# Altium PCB SCOM_BATTPACK.PcbDoc
Units mm, origin at the board's own origin, x right, y up, seen from the top; angles counter-clockwise.
Board outline 137.1 x 87.1 mm, 2 copper layers (L1, L2), stack 1.58 mm thick; 67 components, 36 nets, 209 pads, 776 vias.
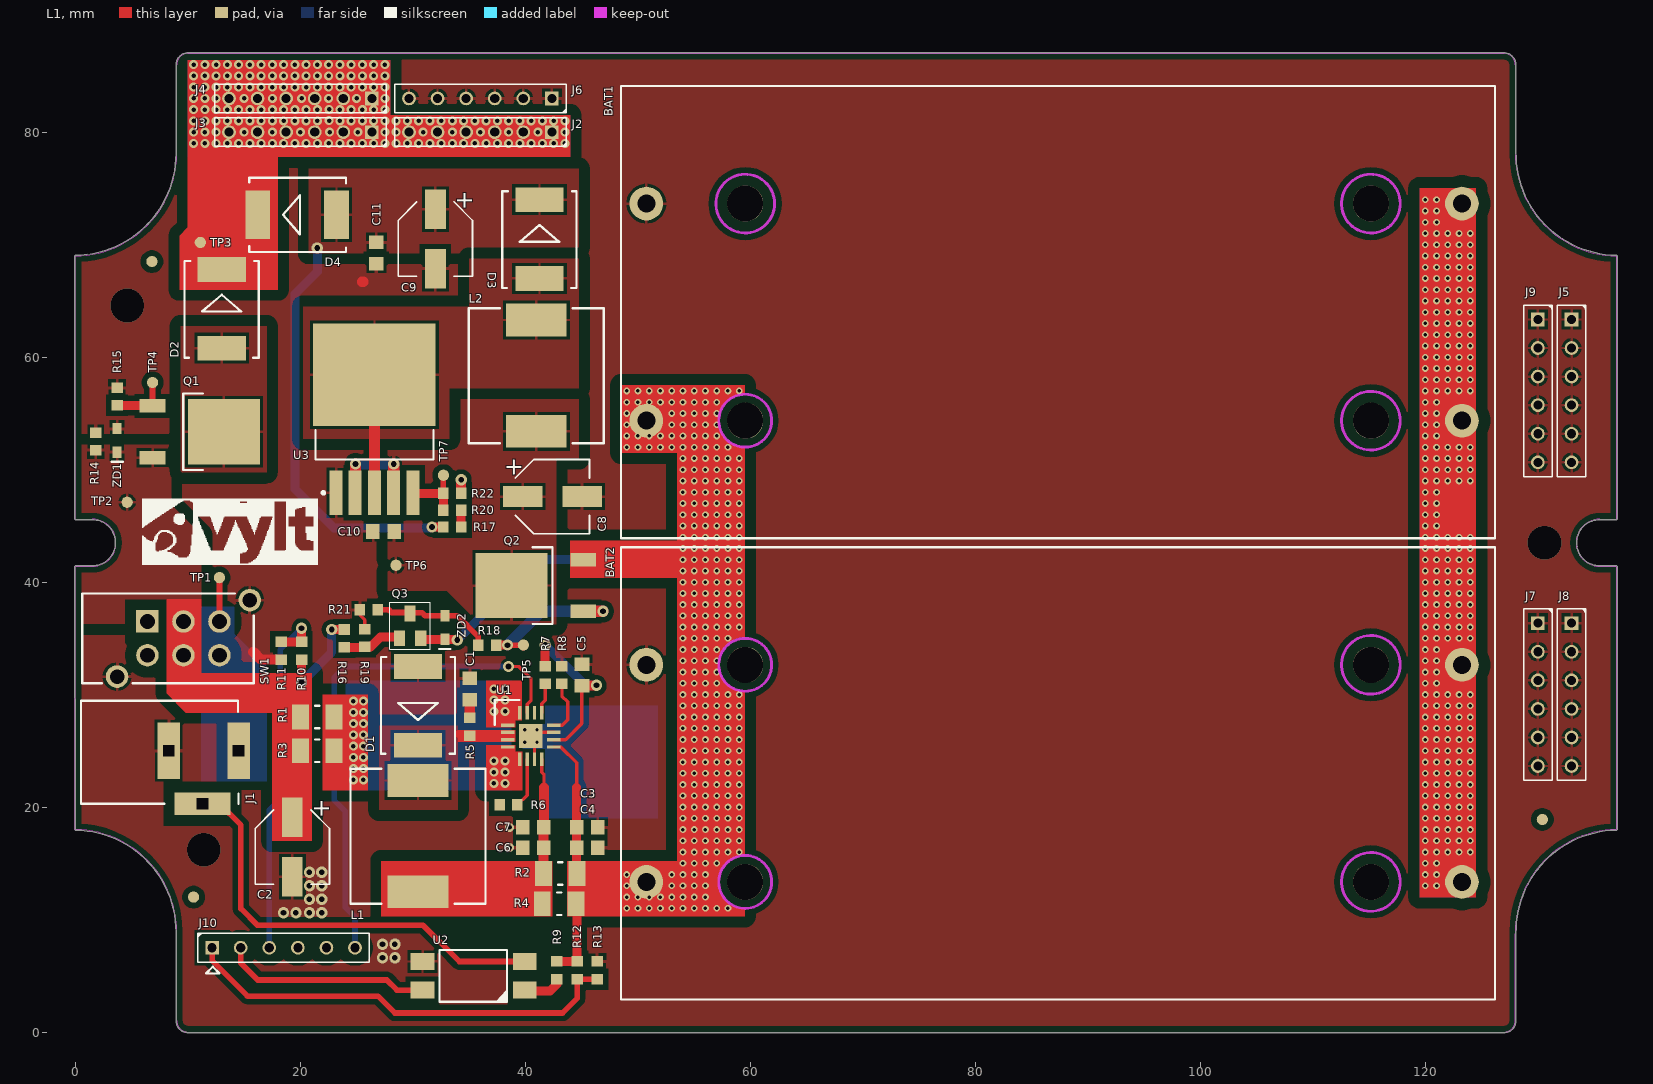
[diagram p0: L1 view]
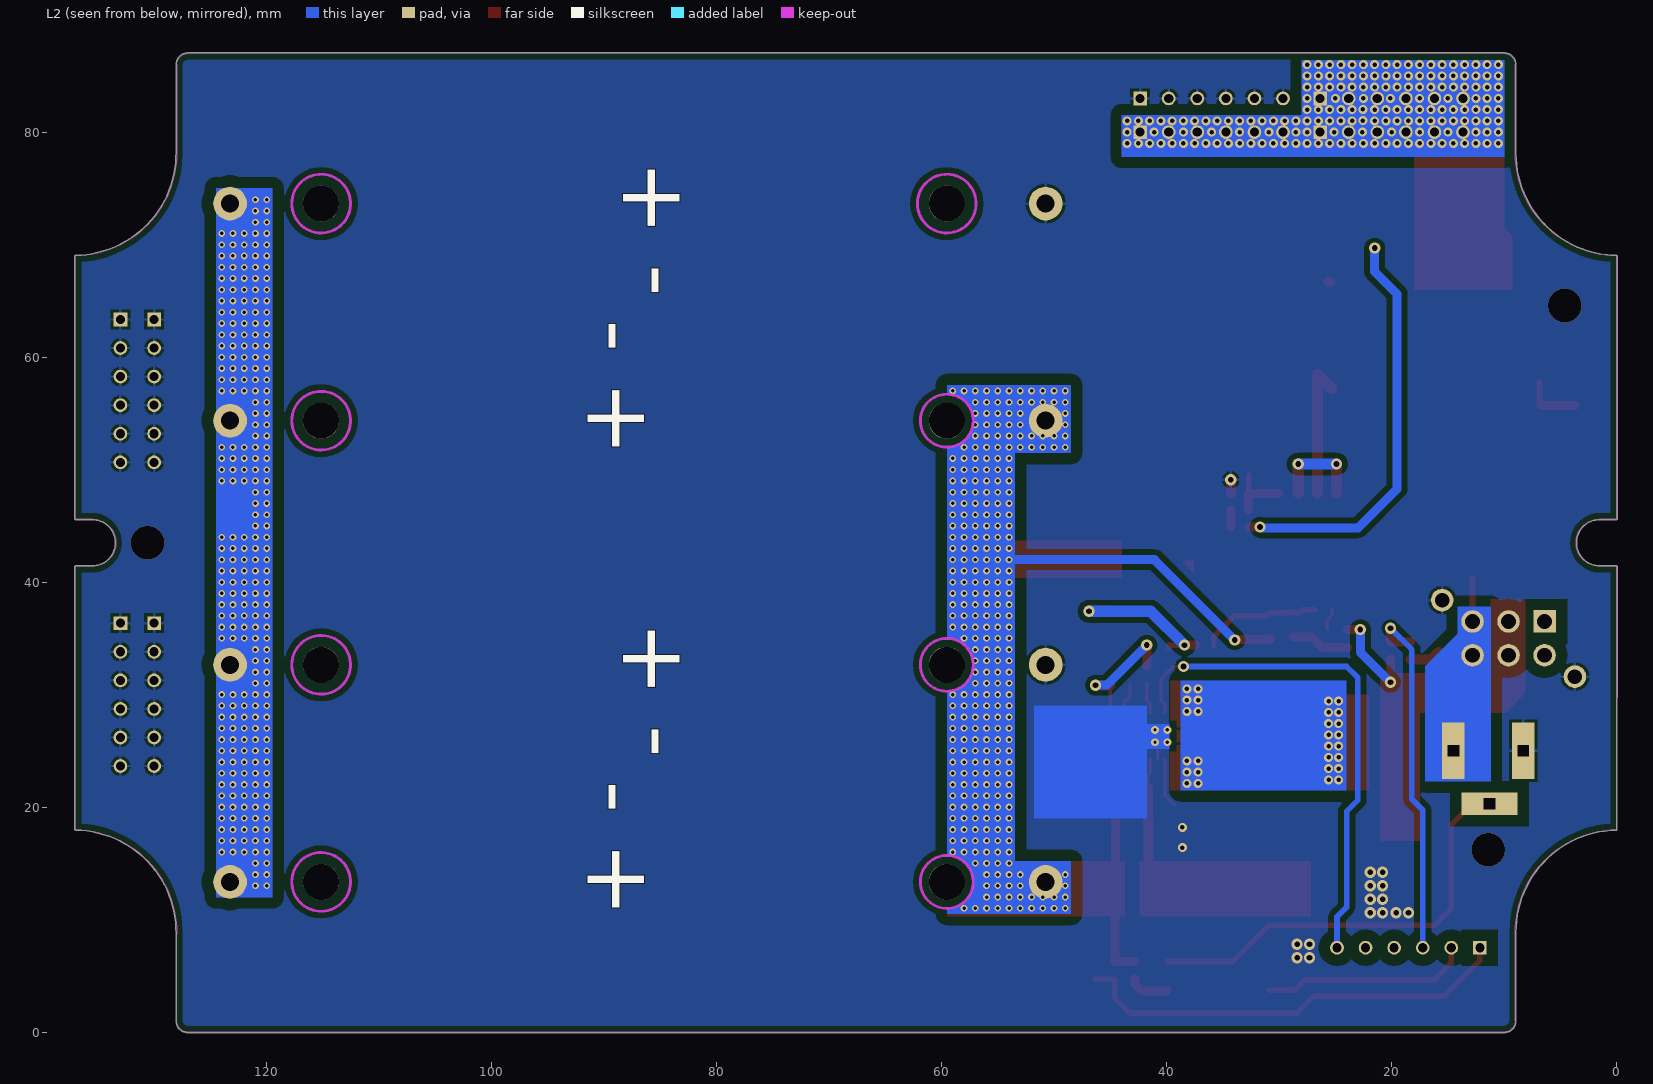
[diagram p1: L2 view, seen from below]
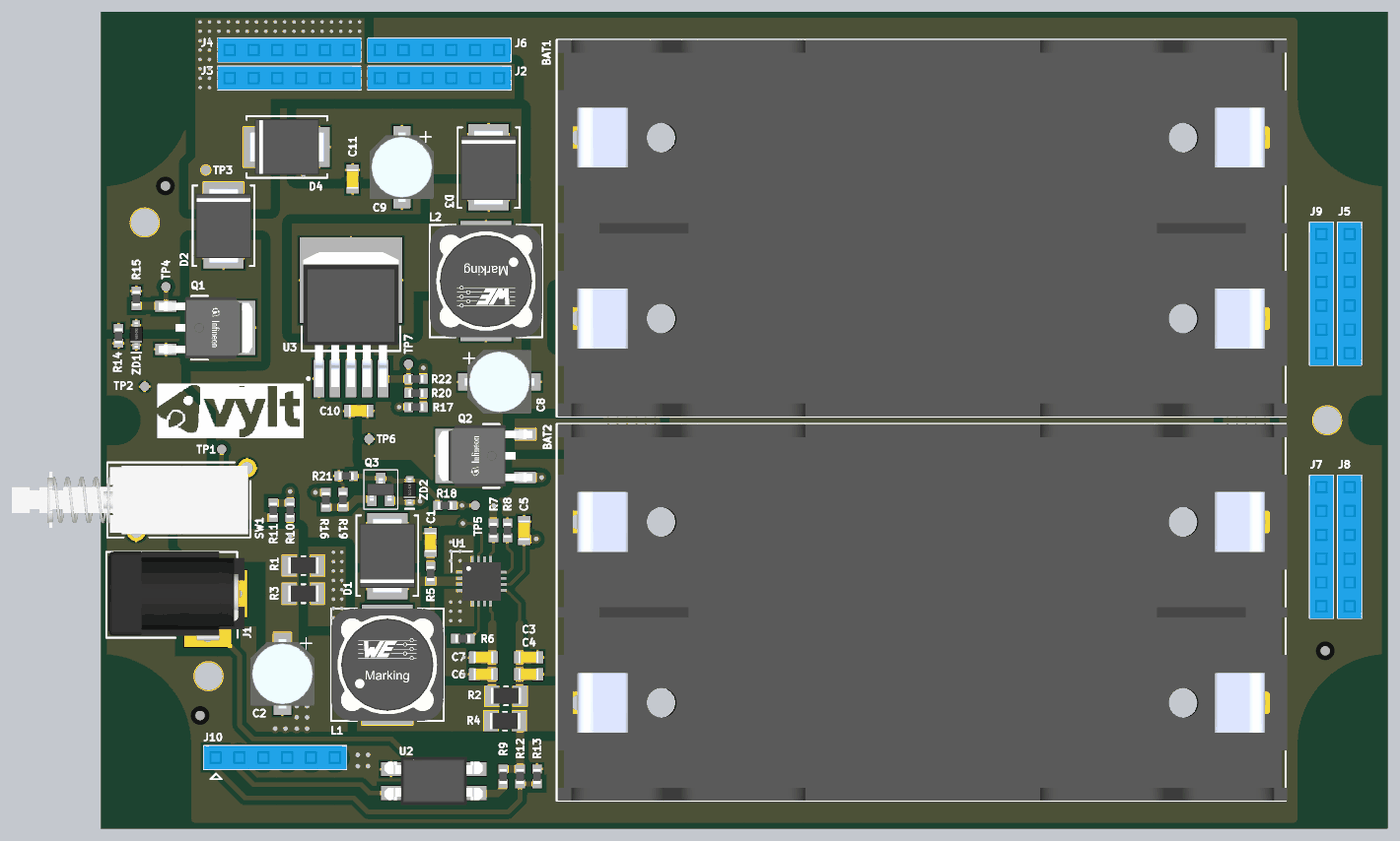
[diagram p2: 3D render of the assembled board from above, using the file's embedded part models]

## Layer stack, top to bottom
Top Solder: solder mask 0.01, Solder Resist, Dk 3.5
L1: signal copper 0.035
Dielectric 1: core 1.51, FR-4, Dk 4
L2: signal copper 0.035
Bottom Solder: solder mask 0.01, Solder Resist, Dk 3.5

## Board outline
-0.004,17.95 -0.05,41.4 0,41.45 1.5,41.45 ccw(c1.5,43.5) 3.55,43.5 ccw(c1.5,43.5) 1.5,45.55 0,45.55 -0.053,45.603 -0.053,69 -0.004,69.05 ccw(c-0.126,78.123) 8.947,78.124 8.947,78.247 8.947,85.997 8.95,86.014 cw(c10,86) 10,87.05 127,87.05 cw(c127,86) 128.05,86.014 128.053,85.997 128.054,78.247 ccw(c137.126,78.123) 137.003,69.051 137.05,68.983 137.05,45.6 137,45.55 135.5,45.55 ccw(c135.5,43.5) 135.5,41.45 137,41.45 137.05,41.4 137.05,18.017 137.004,17.95 ccw(c137.126,8.877) 128.053,8.754 128.053,1.003 128.05,0.986 cw(c127,1) 127,-0.05 10,-0.05 cw(c10,1) 8.95,0.986 8.947,1.003 8.947,8.753 8.947,8.877 ccw(c-0.126,8.877)

## Design rules (kind name [scope] priority, off if disabled: settings)
Clearance [All] p1: gap=0.254 ignorepadtopadclearanceinfootprint=FALSE except(0.178: Track-Track Track-SMDPad SMDPad-SMDPad; 0.5: Arc-Poly Track-Poly SMDPad-Poly; 1: THPad-Poly Poly-Poly Poly-Region)
Height [All] p1: minheight=0 maxheight=55 prefheight=12.7
HoleSize [All] p1: absolutevalues=TRUE maxlimit=10 minlimit=0.025 maxpercent=80.000 minpercent=20.000
MinimumSolderMaskSliver [All] p1: minsoldermaskwidth=0.203
PolygonConnect [All] p1: connectstyle=Relief reliefconductorwidth=0.254 reliefentries=4 polygonreliefangle="90 Angle" airgapwidth=0.254
RoutingVias [All] p1: holewidth=0.711 width=1.27 viastyle="Through Hole" minholewidth=0.1 minwidth=0.1 maxholewidth=0.711 maxwidth=1.27
SilkToSolderMaskClearance [IsPad] p1: minsilkscreentomaskgap=0.203 clearancetoexposedcopper=TRUE
SolderMaskExpansion [All] p1: expansion=0.102 istentingtop=FALSE
SupplyNets "Schematic Supply Nets_5" [InNet('12V0')] p1: voltage=0.000
SupplyNets "Schematic Supply Nets_7" [InNet('TP5100_BATT')] p2: voltage=0.000
SupplyNets "Schematic Supply Nets_6" [InNet('TP5100_VREG')] p3: voltage=0.000
SupplyNets "Schematic Supply Nets_4" [InNet('TP5100_VS')] p4: voltage=0.000
SupplyNets "Schematic Supply Nets_2" [InNet('VCC')] p5: voltage=0.000
SupplyNets "Schematic Supply Nets" [InNet('VIN')] p6: voltage=0.000
SupplyNets "Schematic Supply Nets_1" [InNet('GND')] p7: voltage=0.000
Width [All] p1: maxlimit=5 minlimit=0.178 preferedwidth=0.5
26 further rules are at their usual default settings.

## Classes and differential pairs
net class TP7_Nets: NetR20_2
net class TP6_Nets: NetC8_1
net class R22_Nets: GND NetR20_2
net class R20_Nets: NetR17_2 NetR20_2
net class R17_Nets: NetC9_1 NetR17_2
net class R14_Nets: GND VIN
net class R9_Nets: NetR9_2 TP5100_BATT
net class J2_Nets: 12V0
net class C10_Nets: GND NetC8_1
net class C4_Nets: GND TP5100_BATT
net class R13_Nets: BATT_SOC GND
net class R12_Nets: BATT_SOC TP5100_BATT
net class C9_Nets: GND NetC9_1
net class TP5_Nets: NetQ2_1
net class TP4_Nets: NetQ1_1
net class TP2_Nets: VIN
net class TP1_Nets: VCC
net class TP3_Nets: 12V0
net class R11_Nets: ADAP_VOLT GND
net class R10_Nets: ADAP_VOLT VIN
net class U3_Nets: GND NetC8_1 NetD3_2 NetR20_2
net class R21_Nets: GND NetQ3_3
net class L2_Nets: NetC8_1 NetD3_2
net class D4_Nets: 12V0 NetC9_1
net class C11_Nets: GND NetC9_1
net class C8_Nets: GND NetC8_1
net class C7_Nets: GND TP5100_VS
net class ZD2_Nets: NetQ3_3 TP5100_BATT
net class ZD1_Nets: GND VIN
net class R19_Nets: GND NetQ3_1
net class R18_Nets: NetQ2_1 NetQ3_3
net class R16_Nets: NetQ3_1 VIN
net class R15_Nets: GND NetQ1_1
net class Q3_Nets: NetQ3_1 NetQ3_3 TP5100_BATT
net class Q2_Nets: NetC8_1 NetQ2_1 TP5100_BATT
net class Q1_Nets: NetD2_2 NetQ1_1 VIN
net class D3_Nets: NetC9_1 NetD3_2
net class D2_Nets: 12V0 NetD2_2
net class R6_Nets: NetR6_1 NetR6_2
net class C1_Nets: GND NetC1_1
net class J10_Nets: ADAP_DET_LV ADAP_VOLT BATT_CHRG BATT_SOC NetJ10_4 NetJ10_5
net class C6_Nets: GND TP5100_VS
net class J8_Nets: GND
net class J3_Nets: 12V0
net class D1_Nets: GND NetD1_1
net class C5_Nets: GND TP5100_VREG
net class J6_Nets: GND
net class J7_Nets: GND
net class J4_Nets: 12V0
net class J5_Nets: GND
net class J9_Nets: GND
net class U2_Nets: ADAP_DET_HV ADAP_DET_LV GND NetR9_2
net class R5_Nets: NetC1_1 NetD1_1
net class R2_Nets: TP5100_BATT TP5100_VS
net class SW1_Nets: GND NetSW1_1 NetSW1_4 VCC VIN
net class C2_Nets: GND VIN
net class J1_Nets: ADAP_DET_HV GND VCC
net class U1_Nets: BATT_CHRG GND NetD1_1 NetR1_1 NetR6_2 NetR7_2 NetR8_2 NetU1_14 TP5100_BATT TP5100_VREG TP5100_VS
net class R8_Nets: GND NetR8_2
net class R7_Nets: NetR7_2 TP5100_VREG
net class R4_Nets: TP5100_BATT TP5100_VS
net class R3_Nets: NetR1_1 VIN
net class R1_Nets: NetR1_1 VIN
net class L1_Nets: NetD1_1 TP5100_VS
net class C3_Nets: GND TP5100_BATT
net class BAT2_Nets: GND NetBAT1_2 TP5100_BATT
net class BAT1_Nets: GND NetBAT1_2 TP5100_BATT

## Components (designator, comment, footprint, x,y, rotation, side; value= is the part's Value field where it differs from the comment)
BAT1 "BK-18650-PC4" BK-18650-PC4 87,64 r0 top locked
BAT2 "BK-18650-PC4" BK-18650-PC4 87,23 r0 top locked
C1 "MLCC_0805" CAPC2012X13L 35.055,30.489 r90 top value=100pF
C2 "ERP_102-2" CAP_6.3_7.7 19.277,16.45 r270 top locked value=220uF
C3 "MLCC_0805" CAPC2012X13L 45.5,18.2 r0 top value=10uF
C4 "MLCC_0805" CAPC2012X13L 45.5,16.4 r0 top value=100nF
C5 "MLCC_0805" CAPC2012X13L 45.031,31.75 r90 top value=100nF
C6 "MLCC_0805" CAPC2012X13L 40.7,16.4 r180 top value=10uF
C7 "MLCC_0805" CAPC2012X13L 40.7,18.2 r180 top value=100nF
C8 "ERP_102-2" CAP_6.3_7.7 42.4,47.6 r0 top value=220uF
C9 "ERP_102-2" CAP_6.3_7.7 32,70.5 r270 top value=220uF
C10 "MLCC_0805" CAPC2012X13L 27.4,44.5 r180 top value=100nF
C11 "MLCC_0805" CAPC2012X13L 26.75,69.25 r270 top value=100nF
D1 "ERP_104-3" DIOM6959X26L 30.451,29 r90 top value=SS54C
D2 "ERP_104-3" DIOM6959X26L 13,64.3 r270 top value=SS54C
D3 "ERP_104-3" DIOM6959X26L 41.25,70.5 r270 top value=SS54C
D4 "ERP_104-3" DIOM6959X26L 19.7,72.656 r0 top value=SS54C
J1 "KLDX-0202-AC" KLDX-0202-AC 14.5,25 r0 top locked value=NA
J2 "ERP_148-2" 6PX1R_F 36,80 r0 top locked
J3 "ERP_148-2" 6PX1R_F 20,80 r0 top locked
J4 "ERP_148-2" 6PX1R_F 20,83 r0 top locked
J5 "ERP_148-2" 6PX1R_F 133,57 r90 top locked
J6 "ERP_148-2" 6PX1R_F 36,83 r0 top locked
J7 "ERP_148-2" 6PX1R_F 130,30 r90 top locked
J8 "ERP_148-2" 6PX1R_F 133,30 r90 top locked
J9 "ERP_148-2" 6PX1R_F 130,57 r90 top locked
J10 "ERP_148-2" 6PX1R_F 18.5,7.5 r180 top locked
L1 "IND_1212" IND_1212 30.451,17.417 r270 top locked value=22uH
L2 "IND_1212" IND_1212 40.966,58.35 r90 top value=47uH
Q1 "IRFR5305TRPBF" DPAK229P991X239-3M 11.079,53.361 r270 top
Q2 "IRFR5305TRPBF" DPAK229P991X239-3M 40.9,39.7 r90 top
Q3 "ERP_105-1" MMBT2222 29.748,36.111 r0 top value=MMBT2222A
R1 "RES_1206" RESC3116X06M 21.5,28 r180 top locked value=0R4
R2 "RES_1206" RESC3116X06M 43.1,14.1 r180 top value=0R2
R3 "RES_1206" RESC3116X06M 21.5,25 r180 top locked value=0R4
R4 "RES_1206" RESC3116X06M 43,11.4 r180 top value=0R2
R5 "ERP_101-1" RES_0603 35.055,27.14 r270 top value=3R
R6 "ERP_101-1" RES_0603 38.5,20.2 r0 top value=0R
R7 "ERP_101-1" RES_0603 41.75,31.75 r270 top value=0R
R8 "ERP_101-1" RES_0603 43.25,31.75 r270 top value=50k
R9 "ERP_101-1" RES_0603 42.8,5.5 r270 top value=220R
R10 "ERP_101-1" RES_0603 20.1,33.9 r270 top value=330k
R11 "ERP_101-1" RES_0603 18.3,33.9 r270 top value=100k
R12 "ERP_101-1" RES_0603 44.6,5.5 r90 top value=220k
R13 "ERP_101-1" RES_0603 46.4,5.5 r270 top value=100k
R14 "ERP_101-1" RES_0603 1.8,52.5 r270 top value=100k
R15 "ERP_101-1" RES_0603 3.7,56.5 r270 top value=0R
R16 "ERP_101-1" RES_0603 23.897,35 r90 top value=1k
R17 "ERP_101-1" RES_0603 33.5,44.9 r0 top value=470R
R18 "ERP_101-1" RES_0603 36.6,34.4 r0 top value=0R
R19 "ERP_101-1" RES_0603 25.719,35.031 r90 top value=NM
R20 "ERP_101-1" RES_0603 33.5,46.4 r180 top value=8k2
R21 "ERP_101-1" RES_0603 26.066,37.548 r180 top value=1k
R22 "ERP_101-1" RES_0603 33.5,47.9 r0 top value=1k
SW1 "ERP_110-4" PBH2U 9.6,35 r270 top locked
TP1 "TP_1MM" TP_1MM#1 12.8,40.4 r180 top
TP2 "TP_1MM" TP_1MM#1 4.6,47.1 r180 top
TP3 "TP_1MM" TP_1MM#1 11.1,70.2 r180 top
TP4 "TP_1MM" TP_1MM#2 6.853,57.636 r180 top
TP5 "TP_1MM" TP_1MM#1 39.815,34.41 r180 top
TP6 "TP_1MM" TP_1MM#1 28.5,41.5 r180 top
TP7 "TP_1MM" TP_1MM#3 33,50 r180 top
U1 "TP5100" QFN65P400X400X90_HS-17M 40.48,26.317 r0 top locked
U2 "FOD817A3SD" FOD817A3SD 35.4,5 r180 top
U3 "XL6019" DPAK171P1524X483-6M 26.579,53.192 r90 top
ZD1 "MM3Z" SOD323 3.7,52.6 r90 top value=15V
ZD2 "MM3Z" SOD323 32.832,35.961 r90 top value=15V

## Footprints (in the part's own frame and the unit in brackets; to place one, negate y for a bottom-side part, rotate by r counter-clockwise, add the part's x,y. Pads: shape width x height; smd on the part's side, far side on the other; paste and mask are expansions set on the pad)
6PX1R_F [mm]
  rect 1.22x1.22 / inner round 1.22 / far side rect 1.22x1.22 hole 0.81: 1(6.35,0)
  round 1.22 hole 0.81: 2(3.81,0) 3(1.27,0) 4(-1.27,0) 5(-3.81,0) 6(-6.35,0)
  silkscreen extent -7.62,-1.27 7.62,1.27, body extent -7.62,-1.27 7.62,1.27, height 8.51
BK-18650-PC4 [mm] "2X 18650 Through Hole Battery Holder"
  round 3 hole 1.6: 1(-36.25,9.65) 2(36.25,9.65) 3(-36.25,-9.65) 4(36.25,-9.65)
  round 3.2 hole 3.2 unplated: ""(-27.46,-9.65) ""(-27.46,9.65) ""(28.16,-9.65) ""(28.16,9.65)
  silkscreen extent -38.5,-20.1 39.2,20.1, body extent -38.35,-20.11 39.35,20.11, height 21.74
CAP_6.3_7.7 [mm]
  rect 3.5x1.85 smd: 1(-2.65,0) 2(2.65,0)
  silkscreen extent -3.3,-3.3 3.3,3.3, body extent -3.7,-3.4 3.7,3.4, height 8
CAPC2012X13L [mm] "Chip Capacitor, 2-Leads, Body 2.00x1.25mm, IPC High Density"
  rect 1.2x1.3 smd: 1(-0.95,0) 2(0.95,0)
  body extent -1.05,-0.63 1.05,0.63, height 1.26
DIOM6959X26L [mm] "Molded Diode, 2-Leads, Body 6.86x5.91mm, IPC High Density"
  rect 2.2x4.3 smd: 1(-3.5,0) 2(3.5,0)
  silkscreen extent -4.25,-3.3 4.35,3.3, body extent -3.92,-2.96 4.02,2.96, height 2.62
DPAK171P1524X483-6M [mm] "D2-PAK, 6-Pads, Body 7.93x8.63mm (max), IPC Low Density"
  rect 3.95x1.15 smd: 1(-5.25,3.42) 2(-5.25,1.71) 3(-5.25,0) 4(-5.25,-1.71) 5(-5.25,-3.42)
  rect 9.1x10.9 smd: 6(5.25,0)
  silkscreen extent -5.37,-5.25 0.3,5.25, body extent -6.13,-5.08 8.22,5.08, height 4.65
DPAK229P991X239-3M [mm] "D-PAK, 3-Pads, Body 6.47x6.54mm (max), IPC Low Density"
  rect 1.2x2.28 smd: 1(-2.3,-4.23) 3(2.3,-4.23)
  rect 5.8x6.4 smd: 2(0,2.12)
  silkscreen extent -3.41,-1.5 3.4,0.26, body extent -3.28,-5 3.28,5, height 2.53
FOD817A3SD [mm]
  rect 2.1x1.5 smd: 1(-4.55,1.27) 2(-4.55,-1.27) 3(4.55,-1.27) 4(4.55,1.27)
  silkscreen extent -3,-2.3 3.03,2.3, body extent -5.23,-2.57 5.23,2.53, height 3.84
IND_1212 [mm]
  rect 2.9x5.4 smd: 1(-4.95,0) 2(4.95,0)
  silkscreen extent -6,-6 6,6, body extent -6,-6 6,6, height 8
KLDX-0202-AC [mm] "CONN PWR JACK 2X5.5MM KINKED PIN"
  rect 2x5 hole 1 square: 1(0,0) 2(-6.2,0)
  rect 5x2 hole 1 square: 3(-3.2,-4.7)
  silkscreen extent -14,-4.7 0,4.45, body extent -13.75,-5 0.75,4.5, height 10.85
MMBT2222 [mm]
  rect 1x1.4 smd: 1(-0.95,-1.1) 2(0.95,-1.1) 3(0,1.1)
  silkscreen extent -1.8,-2.1 1.8,2.1, body extent -1.45,-1.2 1.45,1.2, height 1.11
PBH2U [mm]
  rect 2x2 hole 1.3: 1(-1.5,-3.2)
  round 2 hole 1.3: 2(-1.5,0) 3(-1.5,3.2) 4(1.5,-3.2) 5(1.5,0) 6(1.5,3.2) 7(3.4,-5.9) 8(-3.4,5.9)
  silkscreen extent -4,-9 4,6.25, body extent -3.65,-19.2 3.65,6, height 9.15
QFN65P400X400X90_HS-17M [mm] "QFN, 16-Leads, Body 4.00x4.00mm, Pitch 0.65mm, Thermal Pad 2.10x2.10mm, IPC Low Density"
  rect 1.2x0.3 smd mask+0.05: 1(-2.05,0.975) 2(-2.05,0.325) 3(-2.05,-0.325) 4(-2.05,-0.975) 9(2.05,-0.975) 10(2.05,-0.325) 11(2.05,0.325) 12(2.05,0.975)
  rect 0.3x1.2 smd mask+0.05: 5(-0.975,-2.05) 6(-0.325,-2.05) 7(0.325,-2.05) 8(0.975,-2.05) 13(0.975,2.05) 14(0.325,2.05) 15(-0.325,2.05) 16(-0.975,2.05)
  rect 2.1x2.1 smd mask+0.05: 17(0,0)
  silkscreen extent -3.2,1 -1,3.2, body extent -2.05,-2.05 2.05,2.05, height 1
RES_0603 [mm]
  rect 0.94x1.02 smd: 1(-0.79,0) 2(0.79,0)
  body extent -0.8,-0.4 0.8,0.4, height 0.45
RESC3116X06M [mm]
  rect 1.5x2.2 smd: 1(-1.5,0) 2(1.5,0)
  silkscreen extent -0.2,-1 0.2,1, body extent -1.6,-0.85 1.6,0.85, height 0.65
SOD323 [mm] "SOD-323"
  rect 1x0.8 smd: 1(-1.05,0) 2(1.05,0)
  silkscreen extent -1.9,-0.5 -1.9,0.5, body extent -1.35,-0.72 1.35,0.72, height 1.17
TP_1MM#1 [mm]
  round 1 smd: 1(0,0)
TP_1MM#2 [mm]
  round 1 smd: 1(0,-0.11)
TP_1MM#3 [mm]
  round 1 smd: 1(0.29,0.5)

## Part data
BAT1 BAT2: "BATT HOLDER 18650 2 CELL PC PIN", Manufacturer 1=MPD, Manufacturer Part Number 1=BK-18650-PC4
C1 C3 C4 C5 C6 C7 C10 C11: "Chip Capacitor, 2-Leads, Body 2.00x1.25mm, IPC High Density", Package=0805
C2 C8 C9: library part CAP_6.3_7.7, "Electrolytic Capacitor SMD 6.3x7.7", Package=6.3x7.7, ERP=1, Supplier 1=Sharvi
D1 D2 D3 D4: library part SS54, Manufacturer 1=MDD, Manufacturer Part Number 1=SS54C, Package=SMC
J1: "CONN PWR JACK 2X5.5MM KINKED PIN", Manufacturer 1=Sharvi, Manufacturer Part Number 1=ST2001CO0701
J2 J3 J4 J5 J6 J7 J8 J9 J10: library part 6PX1R_F, "6PX1R Female Header"
Q1 Q2: "P Channel MOSFET -55V HEXFET 65mOhms 42nC TO-252-3", Manufacturer 1="International Rectifier", Manufacturer Part Number 1=IRFR5305TRPBF
Q3: library part MMBT2222, "MMBT2222A", Package=SOT23
R1 R2 R3 R4: Package=1206
R5 R6 R7 R8 R9 R10 R11 R12 R13 R14 R15 R16 R17 R18 R19 R20 R21 R22: library part RES_0603, "RES_0603", Package=0603
SW1: library part PBH2U, "Pushbutton Switch DPDT Standard Through Hole, Right Angle", Manufacturer 1=Sharvi, Manufacturer Part Number 1=ST2106CO3161
U1: "Switching-buck type (double 8.4V / single 4.2V) lithium battery charging management chip", Manufacturer 1="Top Power", Manufacturer Part Number 1=TP5100
U2: "OPTOISOLATOR 5KV TRANSISTOR 4SMD"
U3: "5A 180KHz 32V Boost DC to DC Converter", Manufacturer 1=XLSemi, Manufacturer Part Number 1=XL6019
ZD1 ZD2: "Zener SOD-323 0.3W"

## Free pads (board coordinates)
  round 1 smd mask+0.5: 2(6.8,68.5) 2(10.5,12) 2(130.4,18.9)

## Via types
v1: diameter 0.6, hole 0.3, L1 to L2, tented both sides, 546 vias
v2: diameter 0.8, hole 0.4, L1 to L2, tented both sides, 195 vias
v3: diameter 1, hole 0.5, L1 to L2, tented both sides, 28 vias
v4: diameter 0.7, hole 0.3, L1 to L2, 4 vias
v5: diameter 3, hole 3, L1 to L2, 3 vias

## Nets (pads, with @x,y where several pads share a name; then routed paths per layer and width w, separated by ;. In a path a pad name is that pad's centre, name@x,y a point inside that pad or via, vN(x,y) a via of type N, cw(c..) or ccw(c..) an arc to the next point about the centre after c; other vN are vias at no path point)
12V0: D2.1 D4.1 J2.1 J2.2 J2.3 J2.4 J2.5 J2.6 J3.1 J3.2 J3.3 J3.4 J3.5 J3.6 J4.1 J4.2 J4.3 J4.4 J4.5 J4.6 TP3.1
  other v2: 10.5,79 11.5,79 12.5,79 13.5,79 14.5,79 15.5,79 16.5,79 17.5,79 18.5,79 19.5,79 20.5,79 21.5,79 22.5,79 23.5,79 24.5,79 25.5,79 26.5,79 27.5,79 28.5,79 29.5,79 30.5,79 31.5,79 32.5,79 33.5,79 34.5,79 35.5,79 36.5,79 37.5,79 38.5,79 39.5,79 40.5,79 41.5,79 42.5,79 43.5,79 10.5,80 11.5,80 12.5,80 15,80 17.5,80 20,80 22.6,80 25.1,80 27.5,80 28.5,80 30.9,80 33.5,80 36,80 38.5,80 41.1,80 43.5,80 10.5,81 11.5,81 12.5,81 13.5,81 14.5,81 15.5,81 16.5,81 17.5,81 18.5,81 19.5,81 20.5,81 21.5,81 23.5,81 24.5,81 25.5,81 26.5,81 27.5,81 28.5,81 29.5,81 30.5,81 31.5,81 32.5,81 33.5,81 34.5,81 35.5,81 36.5,81 37.5,81 38.5,81 39.5,81 40.5,81 41.5,81 42.5,81 43.5,81 22.545,81.031 10.5,82 11.5,82 12.5,82 13.5,82 14.5,82 15.5,82 16.5,82 17.5,82 18.5,82 19.5,82 20.5,82 21.5,82 23.5,82 24.5,82 25.5,82 26.5,82 27.5,82 22.545,82.031 10.5,83 11.5,83 12.5,83 15,83 17.5,83 20.1,83 22.5,83 25,83 27.5,83 10.5,84 11.5,84 12.5,84 13.5,84 14.5,84 15.5,84 16.5,84 17.5,84 18.5,84 19.5,84 20.5,84 21.5,84 22.5,84 23.5,84 24.5,84 25.5,84 26.5,84 27.5,84 10.5,85 11.5,85 12.5,85 13.5,85 14.5,85 15.5,85 16.5,85 17.5,85 18.5,85 19.5,85 20.5,85 21.5,85 22.5,85 23.5,85 24.5,85 25.5,85 26.5,85 27.5,85 10.5,86 11.5,86 12.5,86 13.5,86 14.5,86 15.5,86 16.5,86 17.5,86 18.5,86 19.5,86 20.5,86 21.5,86 22.5,86 23.5,86 24.5,86 25.5,86 26.5,86 27.5,86
ADAP_DET_HV: J1.3 U2.2 | length 38.8
  L1 w0.5: J1.3 12.8,20.3 14.7,18.4 14.7,10.974 16.174,9.5 30.9,9.5 34.13,6.27 U2.2
ADAP_DET_LV: J10.2 U2.4 | length 18.5
  L1 w0.5: J10.2 14.69,6.143 16.203,4.63 27.67,4.63 28.57,3.73 U2.4
ADAP_VOLT: J10.3 R10.1 R11.1 | length 32.6
  L1 w0.8: R11.1 R10.1 v3(20.1,35.9)
  L2 w0.5: J10.3 17.23,19.73 18.2,20.7 18.2,34 v3(20.1,35.9)
BATT_CHRG: J10.6 U1.15 | length 46.3
  L1 w0.3: v3(38.5,32.5) 39.4,32.5 40.5,31.4 40.5,29.5 40.155,29.155 U1.15
  L2 w0.5: J10.6 24.85,10.25 24,11.1 24,19.624 23,20.624 23,31.5 24,32.5 v3(38.5,32.5)
BATT_SOC: J10.1 R12.1 R13.2 | length 39.6
  L1 w0.5: J10.1 12.15,6.35 15.3,3.2 26.9,3.2 28.4,1.7 43.3,1.7 44.6,3 R12.1 R13.2
GND: BAT1.1 BAT2.1 C1.2 C2.2 C3.2 C4.2 C5.2 C6.2 C7.2 C8.2 C9.2 C10.2 C11.2 D1.2 J1.2 J5.1 J5.2 J5.3 J5.4 J5.5 J5.6 J6.1 J6.2 J6.3 J6.4 J6.5 J6.6 J7.1 J7.2 J7.3 J7.4 J7.5 J7.6 J8.1 J8.2 J8.3 J8.4 J8.5 J8.6 J9.1 J9.2 J9.3 J9.4 J9.5 J9.6 R8.1 R11.2 R13.1 R14.1 R15.1 R19.2 R21.2 R22.2 SW1.7 SW1.8 U1.7 U1.11 U1.17 U2.3 U3.1 ZD1.2 | length 10.5
  L1 w0.3: R21.2 25.276,37.095 25.734,36.637 25.734,35.836 R19.2 ; U1.17 40.805,26.642 U1.11 ; U1.17@40.501,26.317 40.805,26.317 U1.7
  L1 w0.9: 15.8,33.8 16.49,33.11 R11.2 ; 25.5,66.7 25.6,66.7 ; R22.2 v3(34.29,49.09)
  other v2: 38.6,16.4 38.6,18.2
  other v3: 27.3,6.6 28.4,6.6 27.3,7.8 28.4,7.8 18.5,10.6 19.6,10.6 20.8,10.6 21.9,10.6 20.8,11.8 21.9,11.8 20.8,13 21.9,13 20.8,14.2 21.9,14.2
  other v4: 39.93,25.767 41.03,25.767 39.93,26.867 41.03,26.867
  other v5: 11.4,16.2 130.6,43.5 4.6,64.6
NetBAT1_2: BAT1.2 BAT1.4 BAT2.2 BAT2.4
  other v1: 120,13 121,13 120,14 121,14 120,15 121,15 120,16 121,16 122,16 123,16 124,16 120,17 121,17 122,17 123,17 124,17 120,18 121,18 122,18 123,18 124,18 120,19 121,19 122,19 123,19 124,19 120,20 121,20 122,20 123,20 124,20 120,21 121,21 122,21 123,21 124,21 120,22 121,22 122,22 123,22 124,22 120,23 121,23 122,23 123,23 124,23 120,24 121,24 122,24 123,24 124,24 120,25 121,25 122,25 123,25 124,25 120,26 121,26 122,26 123,26 124,26 120,27 121,27 122,27 123,27 124,27 120,28 121,28 122,28 123,28 124,28 120,29 121,29 122,29 123,29 124,29 120,30 121,30 122,30 123,30 124,30 120,31 121,31 120,32 121,32 120,33 121,33 120,34 121,34 120,35 121,35 122,35 123,35 124,35 120,36 121,36 122,36 123,36 124,36 120,37 121,37 122,37 123,37 124,37 120,38 121,38 122,38 123,38 124,38 120,39 121,39 122,39 123,39 124,39 120,40 121,40 122,40 123,40 124,40 120,41 121,41 122,41 123,41 124,41 120,42 121,42 122,42 123,42 124,42 120,43 121,43 122,43 123,43 124,43 120,44 121,44 122,44 123,44 124,44 120,45 121,45 120,46 121,46 120,47 121,47 120,48 121,48 120,49 121,49 122,49 123,49 124,49 120,50 121,50 122,50 123,50 124,50 120,51 121,51 122,51 123,51 124,51 120,52 121,52 122,52 123,52 124,52 120,53 121,53 120,54 121,54 120,55 121,55 120,56 121,56 120,57 121,57 122,57 123,57 124,57 120,58 121,58 122,58 123,58 124,58 120,59 121,59 122,59 123,59 124,59 120,60 121,60 122,60 123,60 124,60 120,61 121,61 122,61 123,61 124,61 120,62 121,62 122,62 123,62 124,62 120,63 121,63 122,63 123,63 124,63 120,64 121,64 122,64 123,64 124,64 120,65 121,65 122,65 123,65 124,65 120,66 121,66 122,66 123,66 124,66 120,67 121,67 122,67 123,67 124,67 120,68 121,68 122,68 123,68 124,68 120,69 121,69 122,69 123,69 124,69 120,70 121,70 122,70 123,70 124,70 120,71 121,71 122,71 123,71 124,71 120,72 121,72 120,73 121,73 120,74 121,74
NetC1_1: C1.1 R5.1 | length 1.6
  L1 w0.9: R5.1 C1.1
NetC8_1: C8.1 C10.1 L2.1 Q2.2 TP6.1 U3.2 U3.4 | length 8.6
  L1 w0.5: U3.2 U3.2@24.9,47.942
  L1 w1: U3.2@24.9,47.942 v3(24.9,50.5) ; U3.4 28.3,47.942 v3(28.3,50.5)
  L2 w1: v3(24.9,50.5) v3(28.3,50.5)
NetC9_1: C9.1 C11.1 D3.1 D4.2 R17.1 | length 36.9
  L1 w0.8: v3(31.7,44.9) R17.1
  L2 w0.8: v3(21.5,69.7) 21.5,67.6 19.5,65.6 19.5,48.3 23,44.8 31.6,44.8 v3(31.7,44.9)
NetD1_1: D1.1 L1.1 R5.2 U1.2 U1.3
NetD2_2: D2.2 Q1.2
NetD3_2: D3.2 L2.2 U3.3 U3.6 | length 12.3
  L1 w1: U3.6@25.3,57.164 U3.6 U3.3
NetJ10_4: J10.4
NetJ10_5: J10.5
NetQ1_1: Q1.1 R15.2 TP4.1 | length 5
  L1 w0.5: Q1.1 6.849,57.742 TP4.1
  L1 w0.8: R15.2 Q1.1@6.64,55.71
NetQ2_1: Q2.1 R18.2 TP5.1 | length 14.2
  L1 w0.5: R18.2@37.4,34.41 R18.2@37.41,34.4 ; v3(38.41,34.4) 39.581,34.4 39.8,34.181 TP5.1@39.8,34.41
  L1 w0.8: R18.2@37.41,34.4 v3(38.41,34.4)
  L1 w1: Q2.1 v3(46.9,37.4)
  L2 w1: v3(38.41,34.4) 41.41,37.4 v3(46.9,37.4)
NetQ3_1: Q3.1 R16.1 R19.1 | length 5.4
  L1 w0.3: R16.1@23.797,34.11 R16.1
  L1 w0.8: R16.1 25.688,34.21 R19.1 26.241,34.241 27.1,35.1 Q3.1@28.75,35.1
NetQ3_3: Q3.3 R18.1 R21.1 ZD2.2 | length 10.7
  L1 w0.5: R21.1 27.852,37.548 28.1,37.3 Q3.3@29.7,37.3 ; Q3.3 29.824,37.286 30.808,37.286 31.084,37.011 ZD2.2 33.969,37.011 35.797,35.183 R18.1@35.797,34.403
NetR1_1: R1.1 R3.1 U1.1 U1.4 U1.5 U1.16
  other v2: 37.201,22.117 38.201,22.117 24.701,22.417 25.601,22.417 37.201,23.117 38.201,23.117 24.701,23.417 25.601,23.417 37.201,24.117 38.201,24.117 24.701,24.417 25.601,24.417 24.701,25.417 25.601,25.417 24.701,26.417 25.601,26.417 24.701,27.417 25.601,27.417 24.701,28.417 25.601,28.417 37.2,28.517 38.2,28.517 24.701,29.417 25.601,29.417 37.201,29.517 38.201,29.517 37.201,30.517 38.201,30.517
NetR6_1: R6.1
NetR6_2: R6.2 U1.6 | length 4.4
  L1 w0.3: R6.2 40.155,21.065 U1.6
NetR7_2: R7.2 U1.13 | length 2.7
  L1 w0.3: U1.13 41.455,29.193 41.75,29.488 R7.2
NetR8_2: R8.2 U1.12 | length 4.8
  L1 w0.3: U1.12 43.292,27.292 43.75,27.75 43.75,29.355 43.25,29.855 R8.2
NetR9_2: R9.2 U2.1 | length 3.6
  L1 w0.8: U2.1 40.007,3.673 42.2,3.673 42.8,4.273 R9.2
NetR17_2: R17.2 R20.1 | length 1.5
  L1 w0.8: R17.2 R20.1
NetR20_2: R20.2 R22.1 TP7.1 U3.5 | length 5.8
  L1 w0.5: R22.1 TP7.1
  L1 w0.8: U3.5@30.041,47.9 R22.1 R20.2
NetSW1_1: SW1.1
NetSW1_4: SW1.4
NetU1_14: U1.14
TP5100_BATT: BAT1.3 BAT2.3 C3.1 C4.1 Q2.3 Q3.2 R2.1 R4.1 R9.1 R12.2 U1.9 ZD2.1 | length 45.4
  L1 w0.3: U1.9 43.158,25.342 44.55,23.95 44.55,22.65 44.55,21.6
  L1 w0.8: Q3.2@30.705,35.005 30.798,34.911 ZD2.1 33.879,34.911 v3(33.935,34.855) ; R9.1 R12.2 44.6,12.017 R4.1@44.5,12.117 ; R2.1@44.55,14.867 C3.1@44.55,17.8 ; C3.1 44.55,21.75
  L2 w0.8: v3(33.935,34.855) 41.08,42 v1(54,42)
  other v1: 49,11 50,11 51,11 52,11 53,11 54,11 55,11 56,11 57,11 58,11 49,12 50,12 51,12 52,12 53,12 54,12 55,12 56,12 49,13 53,13 54,13 55,13 56,13 49,14 53,14 54,14 55,14 56,14 54,15 55,15 56,15 57,15 54,16 55,16 56,16 57,16 58,16 59,16 54,17 55,17 56,17 57,17 58,17 59,17 54,18 55,18 56,18 57,18 58,18 59,18 54,19 55,19 56,19 57,19 58,19 59,19 54,20 55,20 56,20 57,20 58,20 59,20 54,21 55,21 56,21 57,21 58,21 59,21 54,22 55,22 56,22 57,22 58,22 59,22 54,23 55,23 56,23 57,23 58,23 59,23 54,24 55,24 56,24 57,24 58,24 59,24 54,25 55,25 56,25 57,25 58,25 59,25 54,26 55,26 56,26 57,26 58,26 59,26 54,27 55,27 56,27 57,27 58,27 59,27 54,28 55,28 56,28 57,28 58,28 59,28 54,29 55,29 56,29 57,29 58,29 59,29 54,30 55,30 56,30 57,30 58,30 59,30 54,31 55,31 56,31 57,31 54,32 55,32 56,32 57,32 54,33 55,33 56,33 57,33 54,34 55,34 56,34 57,34 54,35 55,35 56,35 57,35 58,35 54,36 55,36 56,36 57,36 58,36 59,36 54,37 55,37 56,37 57,37 58,37 59,37 54,38 55,38 56,38 57,38 58,38 59,38 54,39 55,39 56,39 57,39 58,39 59,39 54,40 55,40 56,40 57,40 58,40 59,40 54,41 55,41 56,41 57,41 58,41 59,41 55,42 56,42 57,42 58,42 59,42 54,43 55,43 56,43 57,43 58,43 59,43 54,44 55,44 56,44 57,44 58,44 59,44 54,45 55,45 56,45 57,45 58,45 59,45 54,46 55,46 56,46 57,46 58,46 59,46 54,47 55,47 56,47 57,47 58,47 59,47 54,48 55,48 56,48 57,48 58,48 59,48 54,49 55,49 56,49 57,49 58,49 59,49 54,50 55,50 56,50 57,50 58,50 59,50 54,51 55,51 56,51 57,51 58,51 59,51 49,52 50,52 51,52 52,52 53,52 54,52 55,52 56,52 57,52 58,52 49,53 50,53 51,53 52,53 53,53 54,53 55,53 56,53 57,53 49,54 53,54 54,54 55,54 56,54 57,54 49,55 53,55 54,55 55,55 56,55 57,55 49,56 50,56 51,56 52,56 53,56 54,56 55,56 56,56 57,56 49,57 50,57 51,57 52,57 53,57 54,57 55,57 56,57 57,57 58,57 59,57
TP5100_VREG: C5.1 R7.1 U1.10 | length 15.6
  L1 w0.3: U1.10 42.538,26 43.567,26 45,27.433 45,29.25 C5.1@45,30.8
  L1 w0.8: R7.1 41.774,32.564 41.75,32.588 v3@41.75,34.391
  L1 w0.9: C5.1 v3@46.285,30.8
  L2 w0.8: v3@41.75,34.391 45.306,30.835 v3(46.321,30.835)
  other v3: 41.774,34.415
TP5100_VS: C6.1 C7.1 L1.2 R2.2 R4.2 U1.8 | length 10.5
  L1 w0.3: U1.8 41.455,23.106 41.65,22.911 41.65,21.75
  L1 w0.9: R2.2 C7.1@41.6,18.45 ; C7.1 41.65,21.75
VCC: J1.1 SW1.3 SW1.6 TP1.1 | length 3.9
  L1 w0.5: SW1.3 TP1.1
VIN: C2.1 Q1.3 R1.2 R3.2 R10.2 R14.2 R16.2 SW1.2 SW1.5 TP2.1 ZD1.1 | length 9.4
  L1 w0.8: v3@19.9,30.7 20.1,30.9 v3(20.1,31.1) R10.2 ; v3(22.776,35.79) R16.2
  L2 w0.8: v3(20.1,31.1) 22.776,33.776 v3(22.776,35.79)
pads on no net: BAT1. BAT2.

## Polygon pours and split planes (outlines as drawn)
GND on L1 "NONET_L-01_P-001" (solid, remove dead copper, pour order 103): -0.133,18.016 -0.133,41.399 -0.083,41.45 1.417,41.45 ccw(c1.417,43.499) 3.467,43.499 ccw(c1.417,43.499) 1.417,45.549 -0.083,45.549 -0.136,45.602 -0.136,68.999 -0.087,69.05 ccw(c-0.21,78.123) 8.864,78.123 8.864,78.246 8.864,85.996 8.867,86.014 cw(c9.917,85.999) 9.917,87.05 126.917,87.05 cw(c126.917,85.999) 127.967,86.014 127.97,85.996 127.971,78.246 127.971,78.245 ccw(c137.043,78.122) 136.92,69.05 136.967,68.982 136.967,45.599 136.917,45.549 135.417,45.549 135.416,45.549 ccw(c135.417,43.499) 135.417,41.45 136.917,41.45 136.967,41.399 136.967,18.016 136.921,17.949 ccw(c137.043,8.876) 127.97,8.753 127.97,8.752 127.97,1.002 127.967,0.985 cw(c126.917,0.999) 126.917,-0.051 9.917,-0.051 cw(c9.917,0.999) 8.867,0.985 8.864,1.002 8.864,8.752 8.864,8.876 ccw(c-0.21,8.876)
NetC8_1 on L1 "NONET_L-01_P-001" (solid, remove dead copper, pour order 101): 27.75,39.25 33,39.25 36,36.25 42.75,36.25 42.75,51 44.75,51 44.75,56.5 27.75,56.5
NetC9_1 on L1 "NONET_L-01_P-001" (solid, remove dead copper, pour order 99): 20.75,76.75 44.75,76.75 44.75,69.25 20.75,69.25
NetD1_1 on L1 "NONET_L-01_P-001" (solid, remove dead copper, pour order 95): 27,19.75 34,19.75 34,27.25 27,27.25
NetD3_2 on L1 "L1-NetD3_2" (solid, remove dead copper, pour order 97): 20.25,52.75 33.25,52.75 33.25,57.25 44.75,57.25 44.75,68.75 35,68.75 35,64.5 20.25,64.5 20.25,57.25
NetD2_2 on L1 "NONET_L-01_P-001" (solid, remove dead copper, pour order 98): 9.352,49.729 9.352,62.75 17,62.75 17,49.77
VIN on L1 "NONET_L-01_P-001" (solid, remove dead copper, pour order 102): 11.2,44.2 8.5,46.9 8.5,52.2 0,52.2 -0.1,52.3 -0.1,36.3 11.2,36.3
GND on L2 "NONET_L-01_P-001" (solid, remove dead copper, pour order 92): -0.133,18.016 -0.133,41.399 -0.083,41.45 1.417,41.45 ccw(c1.417,43.499) 3.467,43.499 ccw(c1.417,43.499) 1.417,45.549 -0.083,45.549 -0.136,45.602 -0.136,68.999 -0.087,69.05 ccw(c-0.21,78.123) 8.864,78.123 8.864,78.246 8.864,85.996 8.867,86.014 cw(c9.917,85.999) 9.917,87.05 126.917,87.05 cw(c126.917,85.999) 127.967,86.014 127.97,85.996 127.971,78.246 127.971,78.245 ccw(c137.043,78.122) 136.92,69.05 136.967,68.982 136.967,45.599 136.917,45.549 135.417,45.549 135.416,45.549 ccw(c135.417,43.499) 135.417,41.45 136.917,41.45 136.967,41.399 136.967,18.016 136.921,17.949 ccw(c137.043,8.876) 127.97,8.753 127.97,8.752 127.97,1.002 127.967,0.985 cw(c126.917,0.999) 126.917,-0.051 9.917,-0.051 cw(c9.917,0.999) 8.867,0.985 8.864,1.002 8.864,8.752 8.864,8.876 ccw(c-0.21,8.876)

## Keep-outs
L1:
  circle w0.254: c59.54,73.65 r2.61
  circle w0.254: c115.16,32.65 r2.61
  circle w0.254: c115.16,54.35 r2.61
  circle w0.254: c115.16,73.65 r2.61
  lines w0.254: 117.77,13.335 cw(c115.16,13.35) 117.77,13.35 ; 61.891,13.35 ccw(c59.54,13.35) 61.891,13.35 ; 61.891,32.65 ccw(c59.54,32.65) 61.891,32.65 ; 61.891,54.35 ccw(c59.54,54.35) 61.891,54.35
L2:
  circle w0.254: c59.54,73.65 r2.61
  circle w0.254: c115.16,13.35 r2.61
  circle w0.254: c115.16,32.65 r2.61
  circle w0.254: c115.16,54.35 r2.61
  circle w0.254: c115.16,73.65 r2.61
  lines w0.254: 61.891,13.35 ccw(c59.54,13.35) 61.891,13.35 ; 61.891,32.65 ccw(c59.54,32.65) 61.891,32.65 ; 61.891,54.35 ccw(c59.54,54.35) 61.891,54.35
Keep-Out Layer:
  lines w0.1: -0.003,18 cw(c-0.126,8.877) 8.997,8.753 8.997,1.003 ; -0.003,45.603 -0.003,69 ccw(c-0.126,78.124) 8.997,78.247 8.997,85.997 ; 0,18.003 0,41.4 1.5,41.4 ccw(c1.5,43.5) 1.5,45.6 0,45.6 ; 9,1 ccw(c10,1) 10,0 127,0 ccw(c127,1) 128,1 ; 9,86 cw(c10,86) 10,87 127,87 cw(c127,86) 128,86 ; 128.003,1.003 128.003,8.753 cw(c137.126,8.877) 137.003,18 ; 128.003,85.997 128.003,78.247 ccw(c137.126,78.123) 137.003,69 ; 137,18.003 137,41.4 135.5,41.4 cw(c135.5,43.5) 135.5,45.6 137,45.6 137,68.998 ; 137.003,69 137.003,69

## Other copper
L1:
  region net TP5100_BATT: 59.5,15.7 ccw(c59.5,13.4) 57.2,13.4 57.2,13.2 ccw(c59.4,13.2) 59.4,11 59.5,11 59.5,10.3 53.5,10.3 53.5,15.7
  region net TP5100_BATT: 59.5,30.3 cw(c59.5,32.6) 57.2,32.6 57.2,32.8 cw(c59.5,32.8) 59.5,35.1 59.5,44 53.5,44 53.5,30.3
  region net TP5100_BATT: 53.5,57.5 59.5,57.5 59.5,56.7 ccw(c59.5,54.4) 57.2,54.4 57.2,54.3 ccw(c59.5,54.3) 59.5,52 53.5,52
  region net 12V0: 9.25,70.8 10,71.55 10,70.8
  region net 12V0: 10,70.8 10,77.8 18,77.8 18,70.8
  region net VIN: 11.2,38.5 11.2,31.9 18.4,31.9 18.4,28.4 9.8,28.4 8.1,30.1 8.1,38.5
  region net TP5100_BATT: 53.5,15.7 59.5,15.7 59.5,25.5 53.5,25.5
  region net TP5100_BATT: 53.5,52 59.5,52 59.5,44 53.5,44
  region net TP5100_BATT: 44,43.7 54.7,43.7 54.7,40.4 44,40.4
  region net 12V0: 18,70.8 18,66 9.25,66 9.25,70.8
  region net NetC8_1: 37.6,40.8 37.6,41.9 38.6,41.9
  region net 12V0: 44,81.5 28,81.5 28,86.4 10,86.4 10,77.8 44,77.8
  region net NetBAT1_2: 124.5,75 119.5,75 119.5,12 124.5,12
  region net NetD1_1: 39.101,26.817 34,26.817 34,25.817 39.101,25.817
  region net NetR1_1: 36.5,25.517 39.101,25.517 39.101,24.917 39.701,24.917 39.701,21.5 36.5,21.5
  region net NetR1_1: 36.5,27.117 39.101,27.117 39.101,27.717 39.655,27.717 39.655,31.25 36.5,31.25
  region net NetD1_1: 33.701,26.8 35.701,26.8 35.701,26.217 33.701,26.217
  region net TP5100_VS: 27.2,15.2 42.4,15.2 42.4,10.3 27.2,10.3
  region net TP5100_BATT: 48.5,15.2 43.7,15.2 43.7,10.3 48.5,10.3
  region net NetR1_1: 22,21.5 26,21.5 26,30 22,30
  region net VIN: 17.5,17 17.5,31.9 21,31.9 21,17
  region net TP5100_BATT: 59.5,30.3 53.5,30.3 53.5,25.5 59.5,25.5
  region net TP5100_BATT: 53.5,15.2 48.5,15.2 48.5,10.3 53.5,10.3
  region net TP5100_BATT: 53.5,57.5 48.5,57.5 48.5,51.5 53.5,51.5
L2:
  region net TP5100_BATT: 59.5,15.7 ccw(c59.5,13.4) 57.2,13.4 57.2,13.2 ccw(c59.4,13.2) 59.4,11 59.5,11 59.5,10.5 53.5,10.5 53.5,15.7
  region net TP5100_BATT: 59.5,30.3 cw(c59.5,32.6) 57.2,32.6 57.2,32.8 cw(c59.5,32.8) 59.5,35.1 59.5,44 53.5,44 53.5,30.3
  region net TP5100_BATT: 53.5,57.5 59.5,57.5 59.5,56.7 ccw(c59.5,54.4) 57.2,54.4 57.2,54.3 ccw(c59.5,54.3) 59.5,52 53.5,52
  region net GND: 44.588,25.174 39.75,25.174 39.75,27.374 44.588,27.374
  region net GND: 41.75,29 51.75,29 51.75,19 41.75,19
  region net NetR1_1: 38.75,21.5 38.75,31.25 24.03,31.25 24.03,21.5
  region net TP5100_BATT: 53.5,15.2 48.5,15.2 48.5,10.5 53.5,10.5
  region net TP5100_BATT: 53.5,15.7 59.5,15.7 59.5,25.5 53.5,25.5
  region net TP5100_BATT: 53.5,52 59.5,52 59.5,44 53.5,44
  region net 12V0: 44,81.5 28,81.5 28,86.4 10,86.4 10,77.8 44,77.8
  region net VCC: 17,22.3 11.2,22.3 11.2,37.8 14.1,37.8 14.1,35.4 17,32.5
  region net TP5100_BATT: 59.5,30.3 53.5,30.3 53.5,25.5 59.5,25.5
  region net TP5100_BATT: 53.5,57.5 48.5,57.5 48.5,51.5 53.5,51.5
  region net NetBAT1_2: 124.5,75 119.5,75 119.5,12 124.5,12

## Silkscreen, mask and mechanical layers (free items; w line width, h text height)
Top Overlay:
  drawing of 6 lines, arcs and shapes, not listed
Bottom Overlay:
  text "+ -" at 81.35,77.511 h10 r270
  text "+ -" at 93.35,51.211 h10 r90
  text "+ -" at 81.35,36.511 h10 r270
  text "+ -" at 93.35,10.211 h10 r90
Dimensions:
  lines w0.1: 0,0 0,0

## Text inside footprints (layer, text, board x,y; h text height)
C2: Top Overlay "+" at 21.207,20.729 h1.52 r270
C8: Top Overlay "+" at 38.121,49.53 h1.52
C9: Top Overlay "+" at 33.93,74.779 h1.52 r270